# EAGLE board post_schematic_v4_charlieplex_v98_v1.1 (EAGLE 9.7.0)
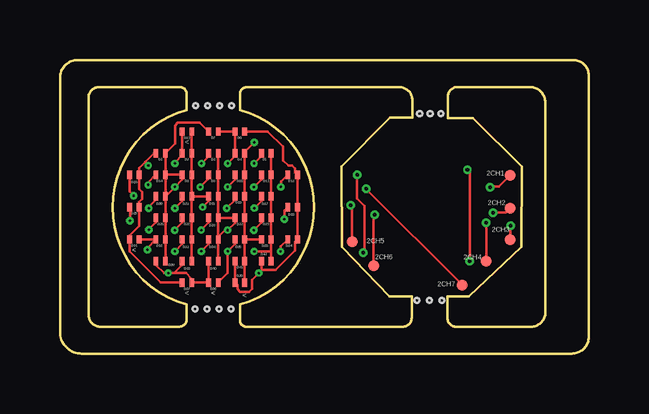
[diagram p0: board, top side]
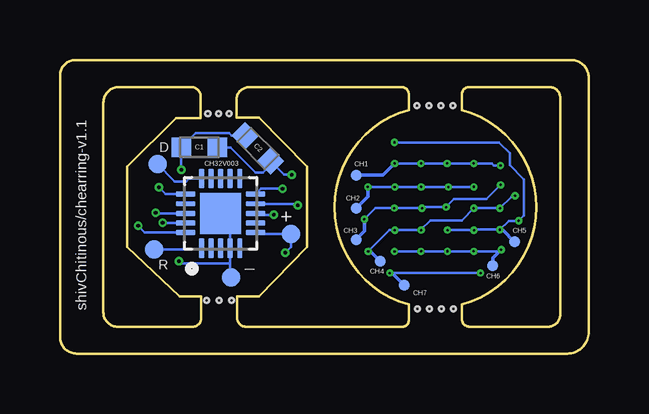
[diagram p1: board, bottom side, seen from below]

Size 22.05 x 12.25 mm. Coordinates in mm from the lower left corner, seen from the top.
Outline: 0.9,0 21.35,0 arc90 22.05,0.7 22.05,11.6 arc90 21.4,12.25 0.75,12.25 arc90 0,11.5 0,0.9 arc90 0.9,0
Outline: 20.24,10.47 20.24,1.72 arc-90 19.64,1.12 16.51,1.12 arc-90 16.16,1.47 16.16,2.39 17.05,2.39 19.25,4.45 19.25,7.79 17.22,9.83 16.18,9.83 16.18,10.72 arc-90 16.58,11.12 19.59,11.12 arc-90 20.24,10.47
Outline: 1.19,1.62 1.19,10.67 arc-90 1.64,11.12 4.99,11.12 arc-90 5.29,10.82 5.29,10.16 arc149 5.29,2.05 5.29,1.44 arc-90 4.97,1.12 1.69,1.12 arc-90 1.19,1.62
Outline: 7.79,11.12 14.14,11.12 arc-90 14.7,10.57 14.7,9.84 13.76,9.84 11.74,7.79 11.76,4.45 13.74,2.39 14.67,2.39 14.67,1.5 arc-90 14.29,1.12 7.77,1.12 arc-90 7.51,1.38 7.51,2.05 arc149 7.5,10.16 7.5,10.79 arc-90 7.79,11.12
Copper layers (1*16): Top / Bottom
Stack-up Default Layer Stack: Top 0.035mm / Dielectric-1 Core:078 0.533mm / Bottom 0.035mm
Design rules: minimum drill size 0.05mm, keepout clearance 0mil, drill distance 0.05mm, via restrict clearance 0mil, dimension clearance 0.1mm, restrict clearance 0mil, copper clearance wire_polygon to wire_polygon 6mil, copper clearance wire_polygon to pad_smd 6mil, copper clearance wire_polygon to via 6mil, copper clearance pad_smd to pad_smd 6mil, copper clearance pad_smd to via 6mil, copper clearance via to via 6mil, copper clearance smd to pad (same net) 6mil, copper clearance smd to via (same net) 6mil, copper clearance smd to smd (same net) 6mil
Holes 0.2 mm at 5.64,1.87 6.14,1.87 6.64,1.87 5.66,10.34 6.16,10.34 6.66,10.34 14.89,2.22 15.41,2.22 7.16,10.34 7.14,1.87 15.93,2.22 15,10.01 15.44,10.01 15.88,10.01

## Footprints (pad centres in the part's own frame; a part is rotated, then mirrored left to right if it is on the bottom)
SMALLPAD = smd 0.457 x 0.457: P$1 0,0
BIGPAD = smd 0.762 x 0.762: P$1 0,0
WCAP-CSGP_0603_R = smd 0.8 x 0.8: 1 -0.75,0; 2 0.75,0
QFN40P300X300X90-21N = smd 0.81 x 0.22: 1 -1.455,0.8; 2 -1.455,0.4; 3 -1.455,0; 4 -1.455,-0.4; 5 -1.455,-0.8; 11 1.455,-0.8; 12 1.455,-0.4; 13 1.455,0; 14 1.455,0.4; 15 1.455,0.8 | smd 0.22 x 0.81: 6 -0.8,-1.455; 7 -0.4,-1.455; 8 0,-1.455; 9 0.4,-1.455; 10 0.8,-1.455; 16 0.8,1.455; 17 0.4,1.455; 18 0,1.455; 19 -0.4,1.455; 20 -0.8,1.455 | smd 1.7 x 1.7: 21 0,0
0201_2.4V_20MA = smd 0.2 x 0.35: A 0.2,0; K -0.2,0

## Placement (x,y rotation side)
2CH1  SMALLPAD  [SMALLPAD]  18.78,7.44 0 top
2CH2  SMALLPAD  [SMALLPAD]  18.78,6.06 0 top
2CH3  SMALLPAD  [SMALLPAD]  18.78,4.76 0 top
2CH4  SMALLPAD  [SMALLPAD]  17.78,3.86 0 top
2CH5  SMALLPAD  [SMALLPAD]  12.18,4.66 0 top
2CH6  SMALLPAD  [SMALLPAD]  13.08,3.66 0 top
2CH7  SMALLPAD  [SMALLPAD]  16.78,2.86 0 top
+  BIGPAD  [BIGPAD]  12.41,4.98 90 bottom
_  BIGPAD  [BIGPAD]  14.92,3.17 90 bottom
C1  10 uF  [WCAP-CSGP_0603_R]  16.24,8.6 180 bottom
C2  100 nF  [WCAP-CSGP_0603_R]  13.79,8.56 135 bottom
CH1  SMALLPAD  [SMALLPAD]  9.7,7.44 0 bottom
CH2  SMALLPAD  [SMALLPAD]  9.7,6.06 0 bottom
CH3  SMALLPAD  [SMALLPAD]  9.7,4.76 0 bottom
CH4  SMALLPAD  [SMALLPAD]  8.7,3.86 0 bottom
CH5  SMALLPAD  [SMALLPAD]  3.1,4.66 0 bottom
CH6  SMALLPAD  [SMALLPAD]  4,3.66 0 bottom
CH7  SMALLPAD  [SMALLPAD]  7.7,2.86 0 bottom
CH32V003  CH32V003  [QFN40P300X300X90-21N]  15.35,5.85 90 bottom
D  BIGPAD  [BIGPAD]  17.98,7.9 90 bottom
D1  0201_2.4V_20MA  [0201_2.4V_20MA]  4.2,8.36 180 top
D2  0201_2.4V_20MA  [0201_2.4V_20MA]  5.3,8.36 180 top
D3  0201_2.4V_20MA  [0201_2.4V_20MA]  6.4,8.36 180 top
D4  0201_2.4V_20MA  [0201_2.4V_20MA]  7.5,8.36 180 top
D5  0201_2.4V_20MA  [0201_2.4V_20MA]  8.6,8.36 180 top
D6  0201_2.4V_20MA  [0201_2.4V_20MA]  7.5,9.26 180 top
D7  0201_2.4V_20MA  [0201_2.4V_20MA]  6.4,9.26 180 top
D8  0201_2.4V_20MA  [0201_2.4V_20MA]  5.3,7.46 180 top
D9  0201_2.4V_20MA  [0201_2.4V_20MA]  6.4,7.46 180 top
D10  0201_2.4V_20MA  [0201_2.4V_20MA]  7.5,7.46 180 top
D11  0201_2.4V_20MA  [0201_2.4V_20MA]  8.6,7.46 180 top
D12  0201_2.4V_20MA  [0201_2.4V_20MA]  9.7,7.46 180 top
D13  0201_2.4V_20MA  [0201_2.4V_20MA]  5.3,9.26 0 top
D14  0201_2.4V_20MA  [0201_2.4V_20MA]  4.2,7.46 180 top
D15  0201_2.4V_20MA  [0201_2.4V_20MA]  6.4,6.56 180 top
D16  0201_2.4V_20MA  [0201_2.4V_20MA]  7.5,6.56 180 top
D17  0201_2.4V_20MA  [0201_2.4V_20MA]  8.6,6.56 180 top
D18  0201_2.4V_20MA  [0201_2.4V_20MA]  9.7,6.11 180 top
D19  0201_2.4V_20MA  [0201_2.4V_20MA]  3.1,7.46 180 top
D20  0201_2.4V_20MA  [0201_2.4V_20MA]  4.2,6.56 180 top
D21  0201_2.4V_20MA  [0201_2.4V_20MA]  5.3,6.56 180 top
D22  0201_2.4V_20MA  [0201_2.4V_20MA]  7.5,5.66 180 top
D23  0201_2.4V_20MA  [0201_2.4V_20MA]  8.6,5.66 180 top
D24  0201_2.4V_20MA  [0201_2.4V_20MA]  9.7,4.76 180 top
D25  0201_2.4V_20MA  [0201_2.4V_20MA]  3.1,6.11 180 top
D26  0201_2.4V_20MA  [0201_2.4V_20MA]  4.2,5.66 180 top
D27  0201_2.4V_20MA  [0201_2.4V_20MA]  5.3,5.66 180 top
D28  0201_2.4V_20MA  [0201_2.4V_20MA]  6.4,5.66 180 top
D29  0201_2.4V_20MA  [0201_2.4V_20MA]  8.6,4.76 180 top
D30  0201_2.4V_20MA  [0201_2.4V_20MA]  7.5,2.96 0 top
D31  0201_2.4V_20MA  [0201_2.4V_20MA]  3.1,4.76 0 top
D32  0201_2.4V_20MA  [0201_2.4V_20MA]  4.2,4.76 180 top
D33  0201_2.4V_20MA  [0201_2.4V_20MA]  5.3,4.76 180 top
D34  0201_2.4V_20MA  [0201_2.4V_20MA]  6.4,4.76 180 top
D35  0201_2.4V_20MA  [0201_2.4V_20MA]  7.5,4.76 180 top
D36  0201_2.4V_20MA  [0201_2.4V_20MA]  6.4,2.96 0 top
D37  0201_2.4V_20MA  [0201_2.4V_20MA]  5.3,2.96 0 top
D38  0201_2.4V_20MA  [0201_2.4V_20MA]  4.2,3.86 180 top
D39  0201_2.4V_20MA  [0201_2.4V_20MA]  5.3,3.86 180 top
D40  0201_2.4V_20MA  [0201_2.4V_20MA]  6.4,3.86 180 top
D41  0201_2.4V_20MA  [0201_2.4V_20MA]  7.5,3.86 180 top
D42  0201_2.4V_20MA  [0201_2.4V_20MA]  8.6,3.86 180 top
R  BIGPAD  [BIGPAD]  18.12,4.35 90 bottom

## Library data of the parts
2CH1-2CH7 + _ CH1-CH7 D R = _CH32LEDBoardCommon.b48ac61f-9cec-4f5a-9267-17ee10f6d24a.flbr
C1 C2 = _CH32LEDBoardCommon.b48ac61f-9cec-4f5a-9267-17ee10f6d24a.flbr; AVAILABILITY: In Stock; CHECK_PRICES: https://www.snapeda.com/parts/885012206014/W%25C3%25BCrth+Elektronik+Midcom/view-part/?ref=eda; DESCRIPTION: Capacitor 10nF Multilayer Ceramic MLCC 10 V , X7R Dielectric 0603 Surface Mount | Wurth Electronics 885012206014; MF: Würth Elektronik; MP: 885012206014; PACKAGE: 0603 Wurth Electronics; PRICE: None; SNAPEDA_LINK: https://www.snapeda.com/parts/885012206014/W%25C3%25BCrth+Elektronik+Midcom/view-part/?ref=snap
CH32V003 = _CH32LEDBoardCommon.b48ac61f-9cec-4f5a-9267-17ee10f6d24a.flbr; AVAILABILITY: In Stock; CHECK_PRICES: https://www.snapeda.com/parts/ATTINY816-MF/Microchip/view-part/?ref=eda; DESCRIPTION: AVR tinyAVR™ 1, Functional Safety (FuSa) Microcontroller IC 8-Bit 16MHz 8KB (8K x 8) FLASH 20-VQFN (3x3); MF: Microchip Technology; MP: ATTINY816-MF; PACKAGE: None; PRICE: None; SNAPEDA_LINK: https://www.snapeda.com/parts/ATTINY816-MF/Microchip/view-part/?ref=snap
D1-D42 = _CH32LEDBoardCommon.b48ac61f-9cec-4f5a-9267-17ee10f6d24a.flbr; AVAILABILITY: In Stock; CHECK_PRICES: https://www.snapeda.com/parts/APG0603CGC-TT/Kingbright/view-part/?ref=eda; DESCRIPTION: Green 571nm LED Indication - Discrete 1.97V 2-SMD, 0201; FOOTPRINT: pre_schematic_v4:LED_APG0603CGC-TT; MF: Kingbright; MP: APG0603CGC-TT; PACKAGE: 0201 Kingbright; PRICE: None; SNAPEDA_LINK: https://www.snapeda.com/parts/APG0603CGC-TT/Kingbright/view-part/?ref=snap

## Nets
CHRLY_1: CH1.P$1 D1.A D2.A D3.A D4.A D5.A D6.A D7.K D13.K D19.K D25.K D31.K D37.K
CHRLY_2: CH2.P$1 D1.K D7.A D8.A D9.A D10.A D11.A D12.A D14.K D20.K D26.K D32.K D38.K
CHRLY_3: CH3.P$1 D2.K D8.K D13.A D14.A D15.A D16.A D17.A D18.A D21.K D27.K D33.K D39.K
CHRLY_4: CH4.P$1 D3.K D9.K D15.K D19.A D20.A D21.A D22.A D23.A D24.A D28.K D34.K D40.K
CHRLY_5: CH5.P$1 D4.K D10.K D16.K D22.K D25.A D26.A D27.A D28.A D29.A D30.A D35.K D41.K
CHRLY_6: CH6.P$1 D5.K D11.K D17.K D23.K D29.K D31.A D32.A D33.A D34.A D35.A D36.A D42.K
CHRLY_7: CH7.P$1 D6.K D12.K D18.K D24.K D30.K D36.K D37.A D38.A D39.A D40.A D41.A D42.A
N$1: +.P$1 C1.1 C2.1 CH32V003.6
N$2: _.P$1 C1.2 C2.2 CH32V003.4 CH32V003.21
N$3: CH32V003.1 R.P$1
N$4: CH32V003.15 D.P$1
N$5: 2CH1.P$1 CH32V003.16
N$6: 2CH2.P$1 CH32V003.18
N$7: 2CH3.P$1 CH32V003.20
N$8: 2CH4.P$1 CH32V003.19
N$9: 2CH6.P$1 CH32V003.8
N$10: 2CH5.P$1 CH32V003.9
N$11: 2CH7.P$1 CH32V003.10

## Tracks (layer width: path | path; a pad name or v marks a point on that pad's centre or on a via)
CHRLY_1  (via drill 0.1 pad 0.1, 0.1 pad 0.11)
  Top 0.1: D1.A 3.92,8.36 3.54,7.98 | D7.K D6.A D4.A 7.3,8.24 v6.99,7.93 | D13.K 5.1,9.1 D2.A 5.1,8.27 4.79,7.97 v4.79,7.93 | D5.A 8.4,8.24 v8.09,7.93 | v5.9,7.93 6.2,8.23 D3.A | D37.K 4.2,2.96 2.9,4.26 D31.K 2.9,4.92 3.3,5.32 D25.K 3.3,6.32 3.42,6.44 3.42,6.73 3.3,6.86 D19.K 3.3,7.74 3.54,7.98 | 3.54,7.98 v3.68,7.84
  Bottom 0.1: v8.09,7.93 v6.99,7.93 v5.9,7.93 v4.79,7.93 4.04,7.93 3.95,7.84 v3.68,7.84
  Bottom 0.152: CH1.P$1 8.58,7.44 v8.09,7.93
CHRLY_2  (via drill 0.1 pad 0.1, 0.1 pad 0.11)
  Top 0.1: D20.K D14.K | D20.K D26.K D32.K D38.K | D14.K D1.K 4.8,8.76 4.8,9.52 4.92,9.64 5.82,9.64 D7.A | v4.79,6.95 5.1,7.25 D8.A D14.K | v4.79,6.95 D20.K | D9.A 6.2,7.3 v5.85,6.95 | D11.A 8.4,7.26 v8.08,6.95 | v4.79,6.95 | D10.A 7.3,7.26 v6.99,6.95 | D12.A 9.21,7.17 v9.21,6.95
  Bottom 0.1: v4.79,6.95 v5.84,6.95 v5.85,6.95 v6.98,6.95 v6.99,6.95 v8.08,6.95 8.09,6.95 v9.2,6.95 v9.21,6.95
  Bottom 0.152: CH2.P$1 9.2,6.56 v9.2,6.95
CHRLY_3  (via drill 0.1 pad 0.1)
  Top 0.1: D21.K D27.K D33.K D39.K | D21.K D15.A 6.2,6.36 v5.95,6.11 | D13.A D2.K D8.K 5.5,7.16 5.5,6.77 5.5,6.76 D21.K | D17.A 8.4,6.36 v8.11,6.07 | v9.36,5.61 9.36,5.97 D18.A | v3.68,7.04 3.68,7.14 D14.A | D16.A 7.3,6.41 v6.95,6.07
  Bottom 0.1: v9.36,5.61 8.89,6.07 v8.11,6.07 v6.95,6.07 6.91,6.11 v5.95,6.11 5.62,6.44 4.27,6.44 v3.68,7.04
  Bottom 0.152: CH3.P$1 9.36,5.1 v9.36,5.61
CHRLY_4  (via drill 0.1 pad 0.1)
  Top 0.1: 6.6,4.86 D34.K D40.K | 6.6,4.86 D28.K | D3.K D9.K D15.K D28.K | v4.79,6.07 5.1,6.37 D21.A | v6.99,5.15 7.3,5.45 D22.A D28.K | 6.6,4.86 6.89,5.15 v6.99,5.15 | D24.A 9.2,4.46 v9.2,4.26 | D20.A 4,6.42 3.7,6.12 v3.7,6.07 | D23.A 8.4,5.46 v8.08,5.15 | v6.99,5.15 | D19.A 2.9,6.76 v3.07,6.59
  Bottom 0.1: v9.2,4.26 8.31,5.15 8.11,5.15 8.1,5.15 | 8.1,5.15 v8.08,5.15 | 8.1,5.15 8.09,5.15 v6.99,5.15 6.99,5.17 6.6,5.56 5.3,5.56 v4.79,6.07 v3.7,6.07 3.23,6.54 3.12,6.54 v3.07,6.59
  Bottom 0.152: v9.2,4.26 9.1,4.26 CH4.P$1
CHRLY_5  (via drill 0.1 pad 0.1)
  Top 0.1: D35.K D22.K D16.K D10.K 7.7,7.56 7.7,7.57 7.7,8.06 D4.K 7.7,8.41 v8.1,8.81 | D27.A 5.1,5.46 v4.78,5.15 | D28.A 6.2,5.46 v5.89,5.15 | D26.A 4,5.46 v3.7,5.17 | D35.K D29.A | D25.A 2.92,6.09 v2.92,5.54 | D35.K D41.K D30.A
  Bottom 0.1: v5.89,5.15 v5.88,5.15 v4.78,5.15 4.76,5.17 3.8,5.17 v3.7,5.17 3.33,5.54 v2.92,5.54 2.7,5.76 2.7,7.26 3.3,7.86 3.3,8.36 3.75,8.81 v8.1,8.81
  Bottom 0.152: CH5.P$1 3.61,5.17 3.8,5.17
CHRLY_6  (via drill 0.1 pad 0.1, 0.1 pad 0.11)
  Top 0.1: D33.A 5.1,4.57 v4.79,4.27 | D34.A 6.2,4.57 v5.89,4.27 | D35.A 7.3,4.57 v6.99,4.27 v7,4.26 7,3.36 D36.A | D31.A D32.A 3.65,4.41 v3.65,4.34 | D5.K D11.K D17.K D23.K 8.8,5.26 8.8,4.97 8.8,4.96 D29.K 8.8,4.26 | 8.8,4.26 D42.K | v8.1,4.26 8.8,4.26
  Bottom 0.1: v8.1,4.26 v8.09,4.27 v6.99,4.27 v5.89,4.27 v4.79,4.27 3.72,4.27 v3.65,4.34
  Bottom 0.152: CH6.P$1 4,3.98 v3.65,4.34
CHRLY_7  (via drill 0.1 pad 0.1, 0.1 pad 0.11)
  Top 0.1: D41.A D30.K 7.4,2.86 7.4,2.7 7.52,2.58 7.88,2.58 8,2.7 8,3.07 v8.29,3.36 | D40.A D36.K D37.A 5.5,3.12 5.26,3.36 4.76,3.36 | D6.K 8.66,9.26 9.3,8.63 9.3,8.06 9.52,7.84 9.68,7.84 9.8,7.72 9.8,7.56 D12.K D18.K D24.K 9.8,4.66 9.8,4.3 8.98,3.48 8.42,3.48 v8.29,3.36 | 4.76,3.36 v4.51,3.36 4.34,3.36 4,3.7 D38.A | 4.76,3.36 5.1,3.7 D39.A | D42.A 8.4,3.47 v8.29,3.36
  Bottom 0.1: v8.29,3.36 v4.51,3.36
  Bottom 0.152: CH7.P$1 8.2,3.36 v8.29,3.36
N$1  (via drill 0.15 pad 0.2)
  Top 0.1: v12.39,7.46 12.39,6.46 12.69,6.16 12.69,4.24 v12.65,4.2
  Bottom 0.1: CH32V003.6 13.83,4.99 +.P$1 12.41,4.44 v12.65,4.2 | 13.19,7.96 12.7,7.46 v12.39,7.46 | 13.19,7.96 C2.1 | C1.1 14.93,8.6 13.89,7.56 13.59,7.56 13.19,7.96
N$2  (via drill 0.15 pad 0.2)
  Top 0.1: v17.09,3.86 17.09,7.56 v16.99,7.66
  Bottom 0.1: 14.95,3.76 14.95,3.2 _.P$1 | 14.95,3.76 CH32V003.4 14.95,5.45 CH32V003.21 | v17.09,3.86 16.99,3.76 14.95,3.76 | v16.99,7.66 C1.2 16.39,9.21 15.01,9.21 14.89,9.09 C2.2
N$3
  Bottom 0.1: R.P$1 16.2,4.35 CH32V003.1
N$4
  Bottom 0.1: CH32V003.15 16.67,7.3 16.79,7.18 17.26,7.18 D.P$1
N$5  (via drill 0.15 pad 0.2)
  Top 0.1: 2CH1.P$1 18.3,6.96 17.93,6.96 v17.93,6.94
  Bottom 0.1: v17.93,6.94 17.64,6.65 CH32V003.16
N$6  (via drill 0.15 pad 0.2)
  Top 0.1: 2CH2.P$1 18.6,5.88 v18.06,5.88
  Bottom 0.1: v18.06,5.88 18.03,5.85 CH32V003.18
N$7  (via drill 0.15 pad 0.2)
  Top 0.1: 2CH3.P$1 18.78,5.29 18.79,5.3 v18.79,5.33
  Bottom 0.1: v18.79,5.33 18.51,5.05 CH32V003.20
N$8  (via drill 0.15 pad 0.2)
  Top 0.1: v17.77,5.46 17.78,5.45 2CH4.P$1
  Bottom 0.1: v17.77,5.46 v17.76,5.45 CH32V003.19
N$9  (via drill 0.15 pad 0.2)
  Top 0.1: 2CH6.P$1 13.08,5.74 v13.13,5.78
  Bottom 0.1: v13.13,5.78 13.83,5.78 CH32V003.8
N$10  (via drill 0.15 pad 0.2)
  Top 0.1: 2CH5.P$1 12.18,6.14 v12.13,6.19
  Bottom 0.1: v12.13,6.19 12.19,6.25 CH32V003.9
N$11  (via drill 0.15 pad 0.2)
  Top 0.1: 2CH7.P$1 v12.77,6.87 v12.77,6.88
  Bottom 0.1: CH32V003.10 13.66,6.88 v12.77,6.88

## Text on the board
SilkscreenBottom: shivChitinous/chearring-v1.1
NamesTop: < | < | < | < | <